# EAGLE board board_full (EAGLE 6.3)
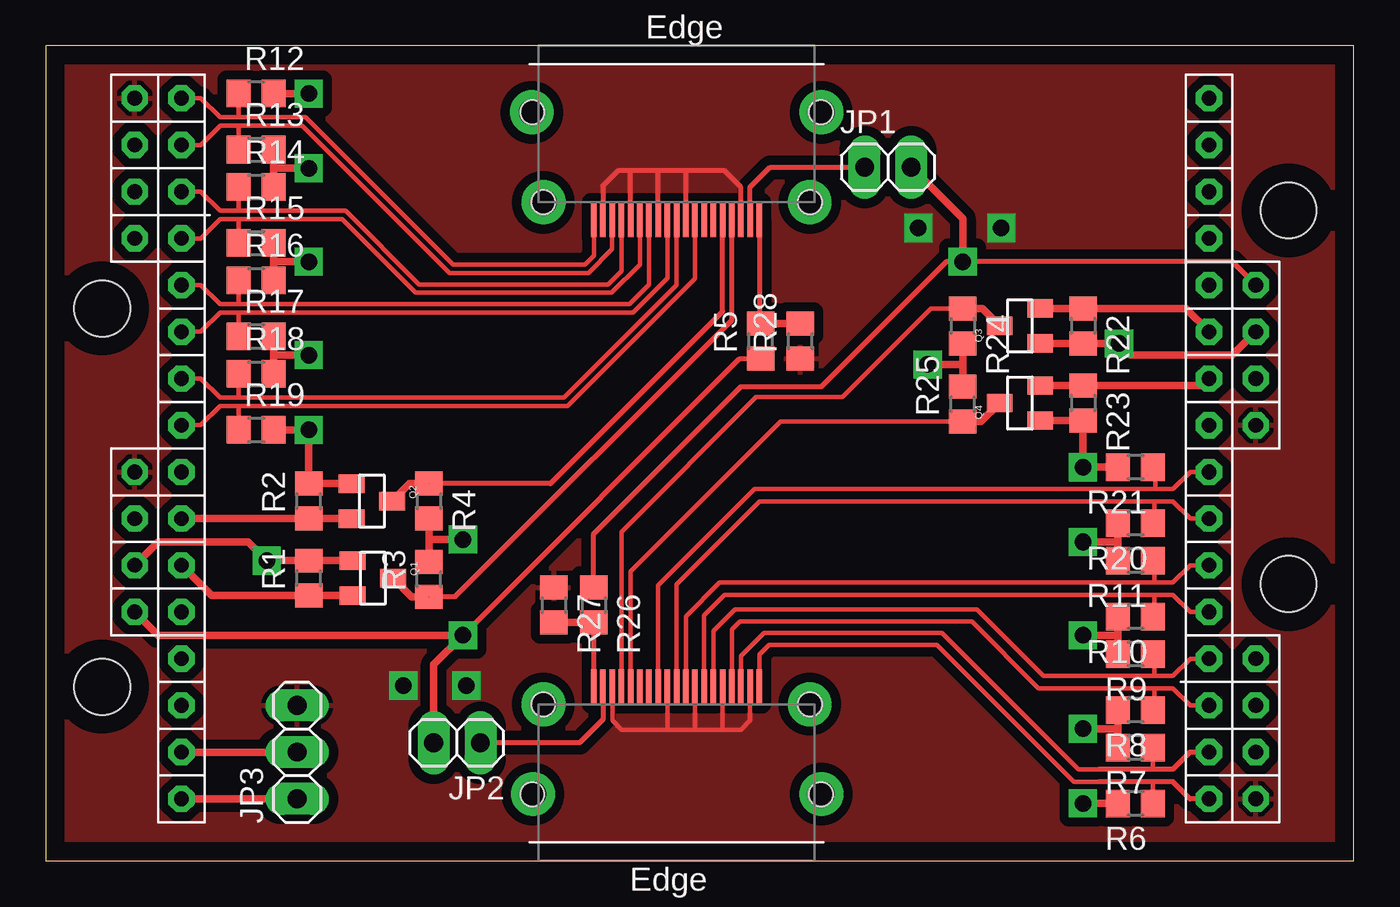
[diagram p0: board, top side]
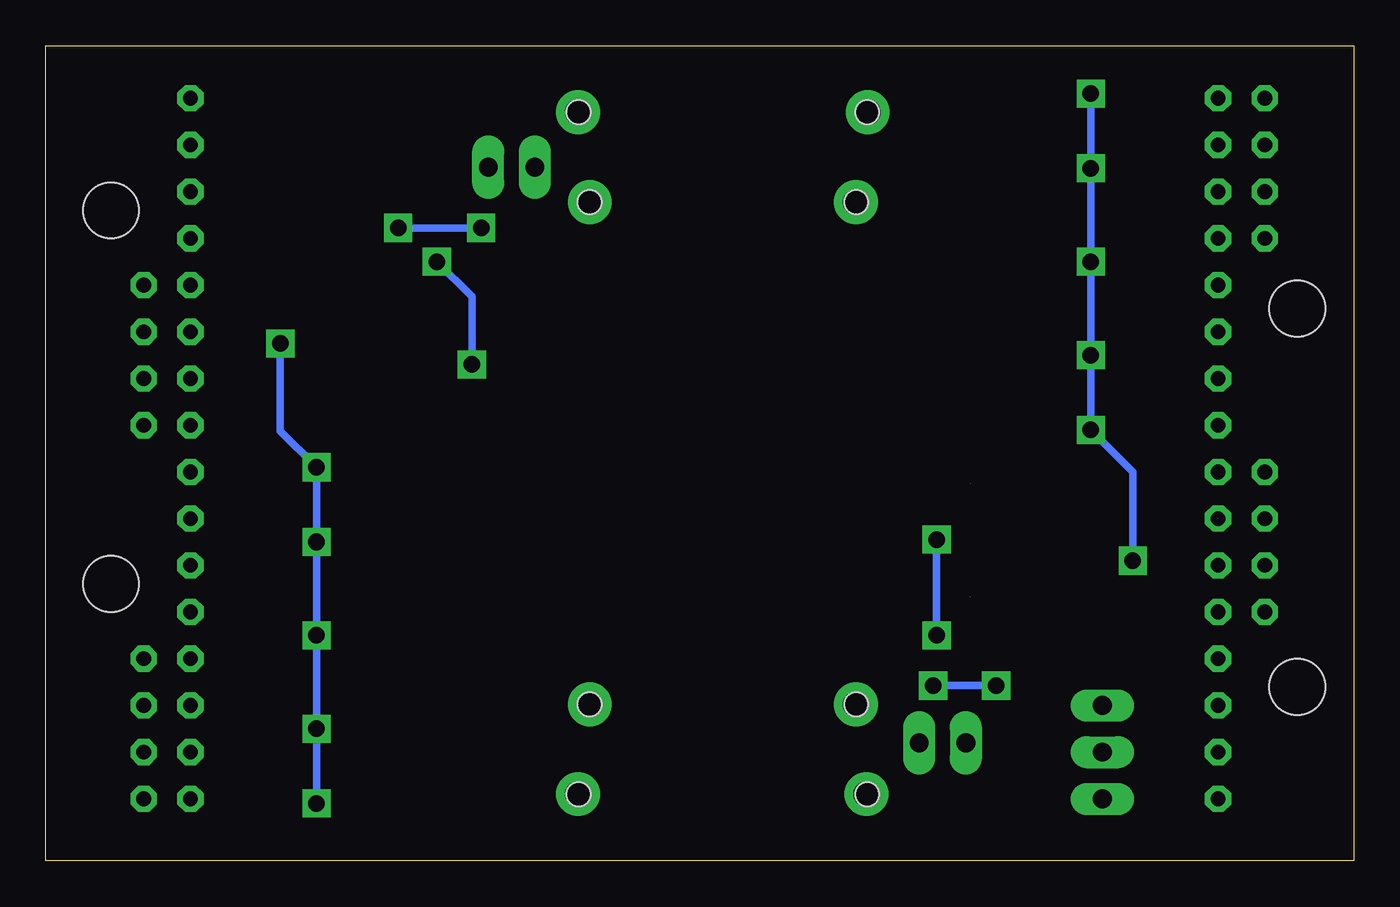
[diagram p1: board, bottom side, seen from below]

Size 71.1 x 44.31 mm. Coordinates in mm from the lower left corner, seen from the top.
Outline: 0,0 71.1,0 71.1,44.31 0,44.31 0,0
Copper layers (1*16): Top 0.035mm / dielectric 1.5mm / Bottom 0.035mm
Design rules "default *": minimum track width 10mil, minimum drill 24mil, track to track 20mil, track to pad 20mil, pad to pad 20mil, via to via 20mil, smd to smd 20mil, copper to edge 40mil, drill to drill 8mil, minimum pad ring 10mil, minimum via ring 8mil, stop-mask expansion 4mil, vias tented up to drill 0mil, thermal gap 10mil

## Footprints (pad centres in the part's own frame; a part is rotated, then mirrored left to right if it is on the bottom)
1X02 = drill 1.016 long: 1 -1.27,0; 2 1.27,0
1X03 = drill 1.016 long: 1 -2.54,0; 2 0,0; 3 2.54,0
SOT23 = smd 1 x 1.4: 1 -0.95,-1.1; 2 0.95,-1.1; 3 0,1.1
R0805 = smd 1.3 x 1.5: 1 -0.95,0; 2 0.95,0
FCI-HDMI-TYPE-A-RECEPT = smd 1.9 x 0.3: P$1 -0.95,4.5; P$2 -0.95,4; P$3 -0.95,3.5; P$4 -0.95,3; P$5 -0.95,2.5; P$6 -0.95,2; P$7 -0.95,1.5; P$8 -0.95,1; P$9 -0.95,0.5; P$10 -0.95,0; P$11 -0.95,-0.5; P$12 -0.95,-1; P$13 -0.95,-1.5; P$14 -0.95,-2; P$15 -0.95,-2.5; P$16 -0.95,-3; P$17 -0.95,-3.5; P$18 -0.95,-4; P$19 -0.95,-4.5 | hole 1.3: 0,7.25; 0,-7.25; 4.9,7.85; 4.9,-7.85
PAPILIO48 = drill 0.8 pad 1.422 octagon: A0 32.766,-20.574; A1 32.766,-18.034; A2 32.766,-15.494; A3 32.766,-12.954; A4 32.766,-10.414; A5 32.766,-7.874; A6 32.766,-5.334; A7 32.766,-2.794; A8 32.766,-0.254; A09 32.766,2.286; A10 32.766,4.826; A11 32.766,7.366; A12 32.766,9.906; A13 32.766,12.446; A14 32.766,14.986; A15 32.766,17.526; AL_2V5 35.306,-18.034; AL_3V3 35.306,-15.494; AL_5V 35.306,-12.954; AL_GND 35.306,-20.574; AU_2V5 35.306,2.286; AU_3V3 35.306,4.826; AU_5V 35.306,7.366; AU_GND 35.306,-0.254; C0 -23.114,17.526; C1 -23.114,14.986; C2 -23.114,12.446; C3 -23.114,9.906; C4 -23.114,7.366; C5 -23.114,4.826; C6 -23.114,2.286; C7 -23.114,-0.254; C8 -23.114,-2.794; C9 -23.114,-5.334; C10 -23.114,-7.874; C11 -23.114,-10.414; C12 -23.114,-12.954; C13 -23.114,-15.494; C14 -23.114,-18.034; C15 -23.114,-20.574; CL_2V5 -25.654,14.986; CL_3V3 -25.654,12.446; CL_5V -25.654,9.906; CL_GND -25.654,17.526; CU_2V5 -25.654,-5.334; CU_3V3 -25.654,-7.874; CU_5V -25.654,-10.414; CU_GND -25.654,-2.794 | hole 3.048: -27.432,6.096; -27.432,-14.478; 37.084,11.43; 37.084,-8.89

## Placement (x,y rotation side)
JP1  [1X02]  45.78,37.72 0 top
JP2  [1X02]  22.35,6.41 180 top
JP3  [1X03]  13.65,5.91 90 top
Q1  MOSFET-NCHANNELBSS138  [SOT23]  17.78,15.37 270 top
Q2  MOSFET-NCHANNELBSS138  [SOT23]  17.72,19.56 270 top
Q3  MOSFET-NCHANNELBSS138  [SOT23]  52.96,29.08 90 top
Q4  MOSFET-NCHANNELBSS138  [SOT23]  52.96,24.89 90 top
R1  [R0805]  14.29,15.37 90 top
R2  [R0805]  14.29,19.56 90 top
R3  [R0805]  20.83,15.3 90 top
R4  [R0805]  20.83,19.56 270 top
R5  [R0805]  38.86,28.26 90 top
R6  [R0805]  59.25,3.11 180 top
R7  [R0805]  59.25,6.16 180 top
R8  [R0805]  59.25,8.19 180 top
R9  [R0805]  59.25,11.24 180 top
R10  [R0805]  59.25,13.27 180 top
R11  [R0805]  59.25,16.32 180 top
R12  [R0805]  11.43,41.72 0 top
R13  [R0805]  11.43,38.67 0 top
R14  [R0805]  11.43,36.64 0 top
R15  [R0805]  11.43,33.59 0 top
R16  [R0805]  11.43,31.56 0 top
R17  [R0805]  11.43,28.51 0 top
R18  [R0805]  11.43,26.48 0 top
R19  [R0805]  11.43,23.43 0 top
R20  [R0805]  59.25,18.35 180 top
R21  [R0805]  59.25,21.4 180 top
R22  [R0805]  56.39,29.08 270 top
R23  [R0805]  56.39,24.89 270 top
R24  [R0805]  49.85,29.08 270 top
R25  [R0805]  49.85,24.83 90 top
R26  [R0805]  29.78,13.91 270 top
R27  [R0805]  27.62,13.91 270 top
R28  [R0805]  41.02,28.26 90 top
U$2  HDMI-TYPE-A-RECEPTICALFCI10029449  [FCI-HDMI-TYPE-A-RECEPT]  34.29,35.81 90 top
U$3  HDMI-TYPE-A-RECEPTICALFCI10029449  [FCI-HDMI-TYPE-A-RECEPT]  34.29,8.51 270 top
U$4  PAPILIO48  [PAPILIO48]  30.48,23.94 0 top

## Library data of the parts
JP1-JP3 = pinhead
Q1-Q4 = SparkFun-DiscreteSemi; PROD_ID: TRANS-00830
R1-R28 = rcl
U$2 U$3 = hdmi
U$4 = papilio

## Nets
3V3: Q1.1 Q2.1 R1.2 R2.2 R12.2 R13.2 R14.2 R15.2 R16.2 R17.2 R18.2 R19.2 U$4.CU_3V3
3V3A: Q3.1 Q4.1 R6.2 R7.2 R8.2 R9.2 R10.2 R11.2 R20.2 R21.2 R22.2 R23.2 U$4.AU_3V3
5V: JP2.2 R3.2 R4.2 R5.1 U$4.CU_5V
5VA: JP1.2 R24.2 R25.2 R26.1 U$4.AU_5V
DDC_SCL_RX: Q2.2 R2.1 U$4.C9
DDC_SCL_TX: Q4.2 R23.1 U$4.A09
DDC_SDA_RX: Q1.2 R1.1 U$4.C10
DDC_SDA_TX: Q3.2 R22.1 U$4.A10
GND: JP3.3 R27.1 R28.1 U$2.P$2 U$2.P$5 U$2.P$8 U$2.P$11 U$2.P$17 U$3.P$2 U$3.P$5 U$3.P$8 U$3.P$11 U$3.P$17 U$4.AL_GND U$4.AU_GND U$4.CL_GND U$4.CU_GND
N$1: JP3.2 U$4.C14
N$2: JP3.1 U$4.C15
RX_CEC: U$2.P$13
RX_DDC_SCL: Q2.3 R4.1 U$2.P$15
RX_DDC_SDA: Q1.3 R3.1 U$2.P$16
RX_HDMI_5V: JP1.1 U$2.P$18
RX_HPD: R5.2 R28.2 U$2.P$19
RX_TMDS0_N: R17.1 U$2.P$9 U$4.C5
RX_TMDS0_P: R16.1 U$2.P$7 U$4.C4
RX_TMDS1_N: R15.1 U$2.P$6 U$4.C3
RX_TMDS1_P: R14.1 U$2.P$4 U$4.C2
RX_TMDS2_N: R13.1 U$2.P$3 U$4.C1
RX_TMDS2_P: R12.1 U$2.P$1 U$4.C0
RX_TMDSC_N: R19.1 U$2.P$12 U$4.C7
RX_TMDSC_P: R18.1 U$2.P$10 U$4.C6
TX_CEC: U$3.P$13
TX_DDC_SCL: Q4.3 R25.1 U$3.P$15
TX_DDC_SDA: Q3.3 R24.1 U$3.P$16
TX_HDMI_5V: JP2.1 U$3.P$18
TX_HPD: R26.2 R27.2 U$3.P$19
TX_TMDS0_N: R11.1 U$3.P$9 U$4.A5
TX_TMDS0_P: R10.1 U$3.P$7 U$4.A4
TX_TMDS1_N: R9.1 U$3.P$6 U$4.A3
TX_TMDS1_P: R8.1 U$3.P$4 U$4.A2
TX_TMDS2_N: R7.1 U$3.P$3 U$4.A1
TX_TMDS2_P: R6.1 U$3.P$1 U$4.A0
TX_TMDSC_N: R21.1 U$3.P$12 U$4.A7
TX_TMDSC_P: R20.1 U$3.P$10 U$4.A6

## Tracks (layer width: path | path; a pad name or v marks a point on that pad's centre or on a via)
3V3  (via drill 0.9)
  Top 0.406: R12.2 v14.29,41.72 | R14.2 12.38,37.72 | 12.38,37.72 R13.2 | v14.29,37.66 12.44,37.66 12.38,37.72 | R16.2 12.38,32.58 | 12.38,32.58 R15.2 | v14.29,32.58 12.38,32.58 | R18.2 12.38,27.62 | 12.38,27.62 R17.2 | v14.29,27.5 12.51,27.5 12.38,27.62 | R19.2 v14.29,23.43 R2.2 Q2.1 | Q1.1 R1.2 v12,16.32 10.99,17.34 6.1,17.34 U$4.CU_3V3
  Bottom 0.406: v14.29,41.72 v14.29,37.66 v14.29,32.58 v14.29,27.5 v14.29,23.43 12,21.14 v12,16.32
3V3A  (via drill 0.9)
  Top 0.406: Q3.1 R22.2 v58.36,28.13 58.99,27.5 64.52,27.5 U$4.AU_3V3 | Q4.1 R23.2 v56.39,21.4 R21.2 | v56.39,3.11 R6.2 | R8.2 58.3,7.18 | 58.3,7.18 R7.2 | v56.39,7.18 58.3,7.18 | R10.2 58.3,12.26 | 58.3,12.26 R9.2 | v56.39,12.26 58.3,12.26 | R20.2 58.3,17.34 | 58.3,17.34 R11.2 | v56.39,17.34 58.3,17.34
  Bottom 0.406: v56.39,3.11 v56.39,7.18 v56.39,12.26 v56.39,17.34 v56.39,21.4 58.36,23.37 v58.36,28.13
5V  (via drill 0.9)
  Top 0.279: v22.67,12.26 37.72,27.31 R5.1
  Top 0.406: R4.2 20.83,17.34 | 20.83,17.34 R3.2 | U$4.CU_5V 6.1,12.26 v22.67,12.26 21.08,10.67 JP2.2 | v22.67,17.46 20.95,17.46 20.83,17.34
  Bottom 0.406: v22.67,12.26 v22.67,17.46
5VA  (via drill 0.9)
  Top 0.279: R26.1 29.78,17.78 37.78,25.78 42.16,25.78 48.96,32.58 v49.85,32.58 64.52,32.58 U$4.AU_5V
  Top 0.406: R24.2 49.85,26.99 | 49.85,26.99 R25.2 | v47.94,26.99 49.85,26.99 | JP1.2 49.85,34.92 v49.85,32.58
  Bottom 0.406: v47.94,26.99 47.94,30.67 v49.85,32.58
DDC_SCL_RX  (1 unrouted)
  Top 0.406: Q2.2 R2.1 U$4.C9
DDC_SCL_TX
  Top 0.406: Q4.2 R23.1 62.86,25.84 U$4.A09
DDC_SDA_RX
  Top 0.406: Q1.2 R1.1 9.01,14.42 U$4.C10
DDC_SDA_TX
  Top 0.406: Q3.2 R22.1 61.98,30.03 U$4.A10
GND  (via drill 0.9)
  Top 0.254: U$3.P$2 38.29,7.62 37.78,7.11 36.77,7.11 | 36.77,7.11 35.24,7.11 | 35.24,7.11 33.72,7.11 | 33.72,7.11 31.3,7.11 30.8,7.62 U$3.P$17 | U$3.P$11 33.79,7.18 33.72,7.11 | U$3.P$8 35.29,7.16 35.24,7.11 | U$3.P$5 36.79,7.14 36.77,7.11
  Top 0.279: U$2.P$17 37.79,36.63 36.89,37.53 34.8,37.53 | 34.8,37.53 33.34,37.53 | 33.34,37.53 31.75,37.53 | 31.75,37.53 31.11,37.53 30.29,36.7 U$2.P$2 | U$2.P$2 | U$2.P$5 31.79,37.49 31.75,37.53 | U$2.P$8 33.29,37.48 33.34,37.53 | U$2.P$11 34.79,37.52 34.8,37.53
  Bottom 0.406: v47.43,34.42 v51.94,34.42 | v19.43,9.53 v22.86,9.53
  pour Top: 0,0 71.12,0 71.12,44.32 0,44.32
N$1
  Top 0.406: U$4.C14 JP3.2
N$2
  Top 0.406: U$4.C15 JP3.1
N$3  (via drill 1.4)
  other vias: 26.42,40.7
N$4  (via drill 1.4)
  other vias: 27.05,35.81
N$5  (via drill 1.4)
  other vias: 42.16,40.7
N$6  (via drill 1.4)
  other vias: 41.53,35.81
N$7  (via drill 1.4)
  other vias: 42.16,3.62
N$8  (via drill 1.4)
  other vias: 41.53,8.51
N$9  (via drill 1.4)
  other vias: 27.05,8.51
N$10  (via drill 1.4)
  other vias: 26.48,3.62
RX_DDC_SCL  (1 unrouted)
  Top 0.279: U$2.P$15 36.79,29.87 27.43,20.51 R4.1
  Top 0.406: R4.1 19.77,20.51 Q2.3
RX_DDC_SDA  (1 unrouted)
  Top 0.279: U$2.P$16 37.29,29.42 22.23,14.35 R3.1
  Top 0.406: R3.1 19.89,14.35 Q1.3
RX_HDMI_5V
  Top 0.279: U$2.P$18 38.29,36.64 39.37,37.72 JP1.1
RX_HPD
  Top 0.279: U$2.P$19 38.79,29.28 R5.2
  Top 0.406: R5.2 R28.2
RX_TMDS0_N
  Top 0.254: U$4.C5 8.42,28.77 9.46,29.81 10.45,29.81 | U$2.P$9 33.79,31.69 31.91,29.81 10.45,29.81 | 10.45,29.81 10.48,29.78 R17.1
RX_TMDS0_P
  Top 0.254: U$4.C4 8.42,31.3 9.46,30.26 10.45,30.26 | U$2.P$7 32.79,31.34 31.72,30.26 10.45,30.26 | 10.45,30.26 10.48,30.29 R16.1
RX_TMDS1_N
  Top 0.254: U$4.C3 8.42,33.85 9.46,34.89 10.45,34.89 | 10.45,34.89 16.1,34.89 20.1,30.89 30.77,30.89 32.29,32.41 U$2.P$6 | 10.45,34.89 10.48,34.86 R15.1
RX_TMDS1_P
  Top 0.254: U$4.C2 8.42,36.39 9.46,35.34 10.45,35.34 | 10.45,35.34 16.29,35.34 20.29,31.34 30.58,31.34 31.29,32.06 U$2.P$4 | 10.45,35.34 10.48,35.37 R14.1
RX_TMDS2_N
  Top 0.254: U$4.C1 8.42,38.92 9.46,39.97 10.45,39.97 | 10.45,39.97 13.94,39.97 21.94,31.97 29.5,31.97 30.79,33.26 U$2.P$3 | 10.45,39.97 10.48,39.94 R13.1
RX_TMDS2_P
  Top 0.254: U$4.C0 8.42,41.47 9.46,40.42 10.39,40.42 | 10.39,40.42 14.13,40.42 22.13,32.42 29.31,32.42 29.79,32.91 U$2.P$1 | 10.39,40.42 10.48,40.51 R12.1
RX_TMDSC_N
  Top 0.254: U$4.C7 8.42,23.69 9.46,24.73 10.45,24.73 | 10.45,24.73 28.35,24.73 35.29,31.66 U$2.P$12 | 10.45,24.73 10.48,24.7 R19.1
RX_TMDSC_P
  Top 0.254: U$4.C6 8.42,26.23 9.46,25.18 10.45,25.18 | 10.45,25.18 28.16,25.18 34.29,31.31 U$2.P$10 | 10.45,25.18 10.48,25.21 R18.1
TX_DDC_SCL
  Top 0.254: U$3.P$15 31.79,15.72 39.94,23.88 R25.1
  Top 0.406: R25.1 50.85,23.88 Q4.3
TX_DDC_SDA
  Top 0.254: U$3.P$16 31.29,17.89 38.61,25.21 43.31,25.21 48.13,30.03 R24.1
  Top 0.406: R24.1 50.91,30.03 Q3.3
TX_HDMI_5V
  Top 0.279: U$3.P$18 30.29,7.68 29.02,6.41 JP2.1
TX_HPD
  Top 0.279: U$3.P$19 29.79,12.95 R26.2
  Top 0.406: R27.2 R26.2
TX_TMDS0_N
  Top 0.254: U$4.A5 62.22,16.07 61.28,15.13 60.26,15.13 | 60.13,16.32 R11.1 60.26,16.32 60.26,15.13 | 60.26,15.13 36.63,15.13 34.79,13.29 U$3.P$9
TX_TMDS0_P
  Top 0.254: U$4.A4 62.22,13.53 61.28,14.46 60.26,14.46 | 60.13,13.27 R10.1 60.26,13.27 60.26,14.46 | 60.26,14.46 36.9,14.46 35.79,13.35 U$3.P$7
TX_TMDS1_N
  Top 0.254: U$4.A3 62.22,10.99 61.28,10.05 60.26,10.05 | 60.26,10.05 54.24,10.05 50.62,13.66 37.45,13.66 36.29,12.5 U$3.P$6 | R9.1 | R9.1 60.13,11.24 | R9.1 60.26,11.24 60.26,10.05
TX_TMDS1_P
  Top 0.254: U$4.A2 62.22,8.45 61.28,9.38 60.26,9.38 | 60.13,8.19 R8.1 60.26,8.19 60.26,9.38 | U$3.P$4 37.29,12.57 37.73,13.01 50.35,13.01 53.97,9.38 60.26,9.38
TX_TMDS2_N
  Top 0.254: R7.1 60.2,5.04 60.26,4.98 | U$3.P$3 37.79,11.14 39.04,12.39 48.71,12.39 56.13,4.98 57.28,4.98
  Top 0.279: U$4.A1 62.2,5.91 61.28,4.98 60.26,4.98 57.28,4.98
TX_TMDS2_P
  Top 0.254: R6.1 60.2,4.29 | U$3.P$1 38.79,11.21 39.32,11.73 48.44,11.73 55.88,4.29 57.28,4.29
  Top 0.279: U$4.A0 62.2,3.37 61.28,4.29 60.2,4.29 57.28,4.29
TX_TMDSC_N
  Top 0.254: U$4.A7 62.22,21.14 61.28,20.21 60.33,20.21 | R21.1 60.33,21.4 60.33,20.21 | 60.33,20.21 38.53,20.21 33.29,14.96 U$3.P$12
TX_TMDSC_P
  Top 0.254: U$4.A6 62.22,18.61 61.28,19.55 60.26,19.55 | R20.1 60.26,18.35 60.26,19.55 | 60.26,19.55 38.81,19.55 34.29,15.03 U$3.P$10